# Altium PCB H-bridge_(withoutWires).PcbDoc
Units mm, origin at the board's own origin, x right, y up, seen from the top; angles counter-clockwise.
Board outline 157.99 x 101.6 mm, 2 copper layers (Top Layer, Bottom Layer); 69 components, 61 nets, 204 pads, 17 vias.
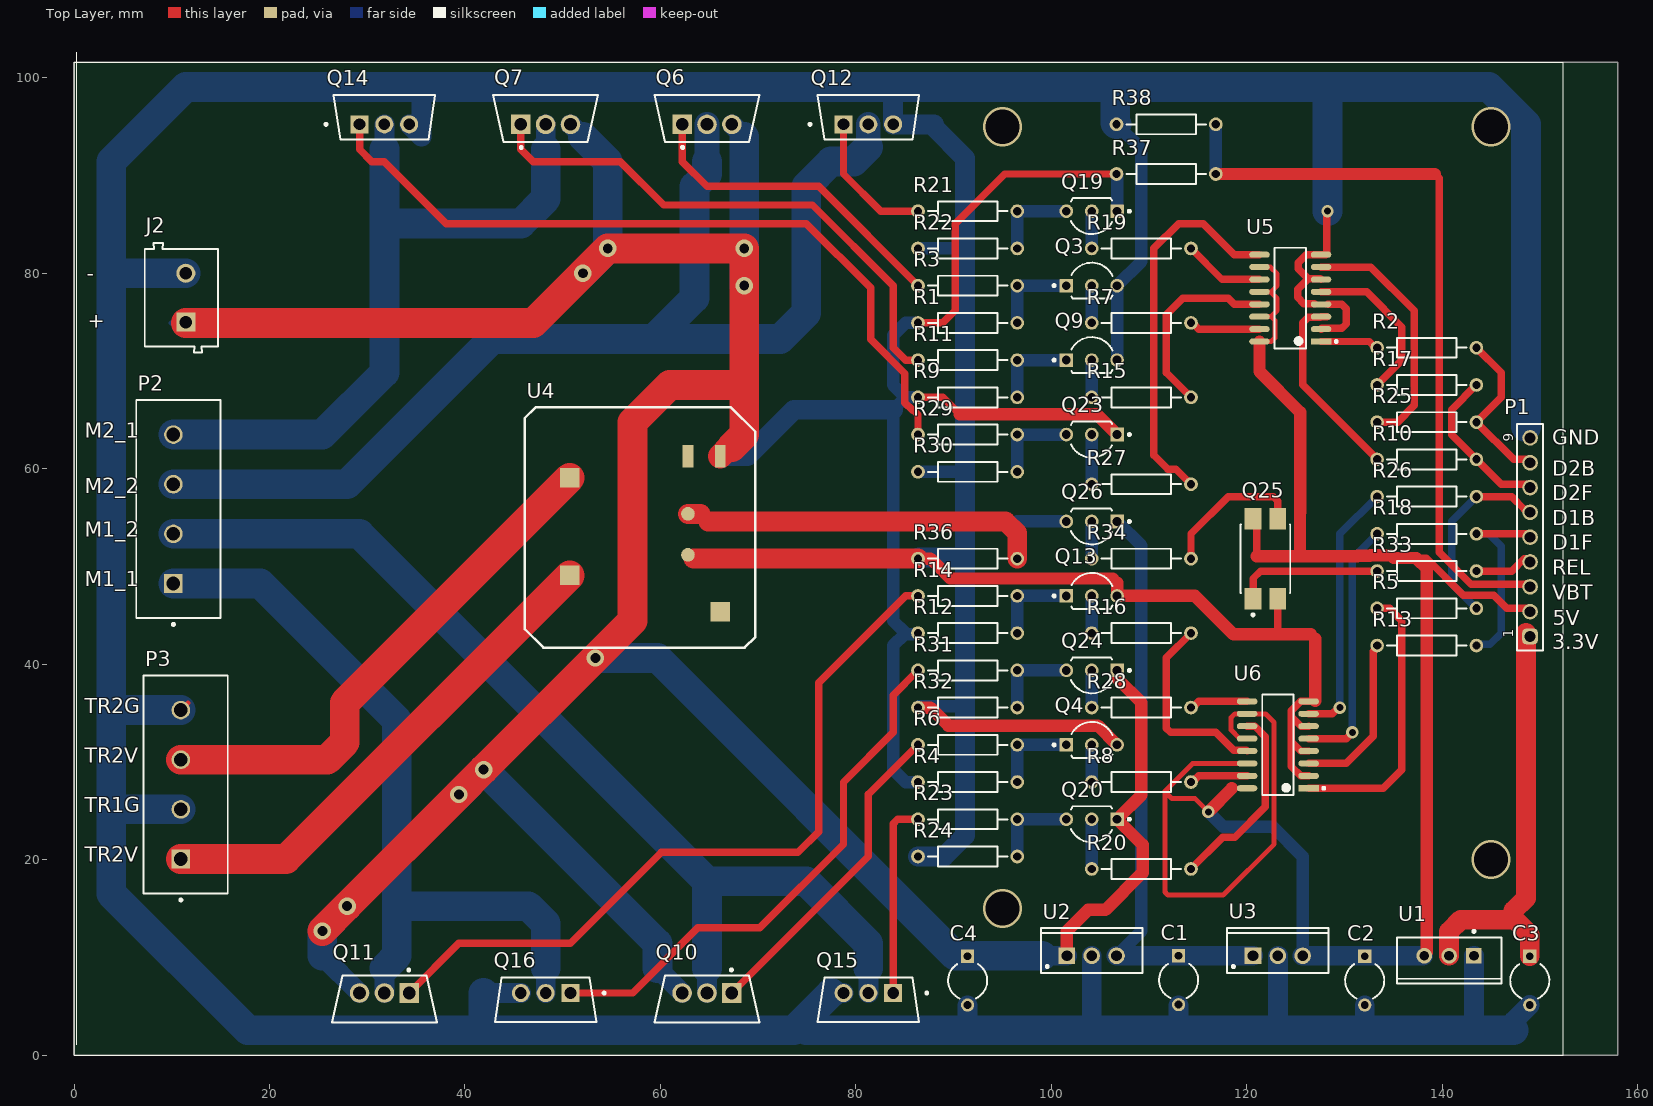
[diagram p0: Top Layer view]
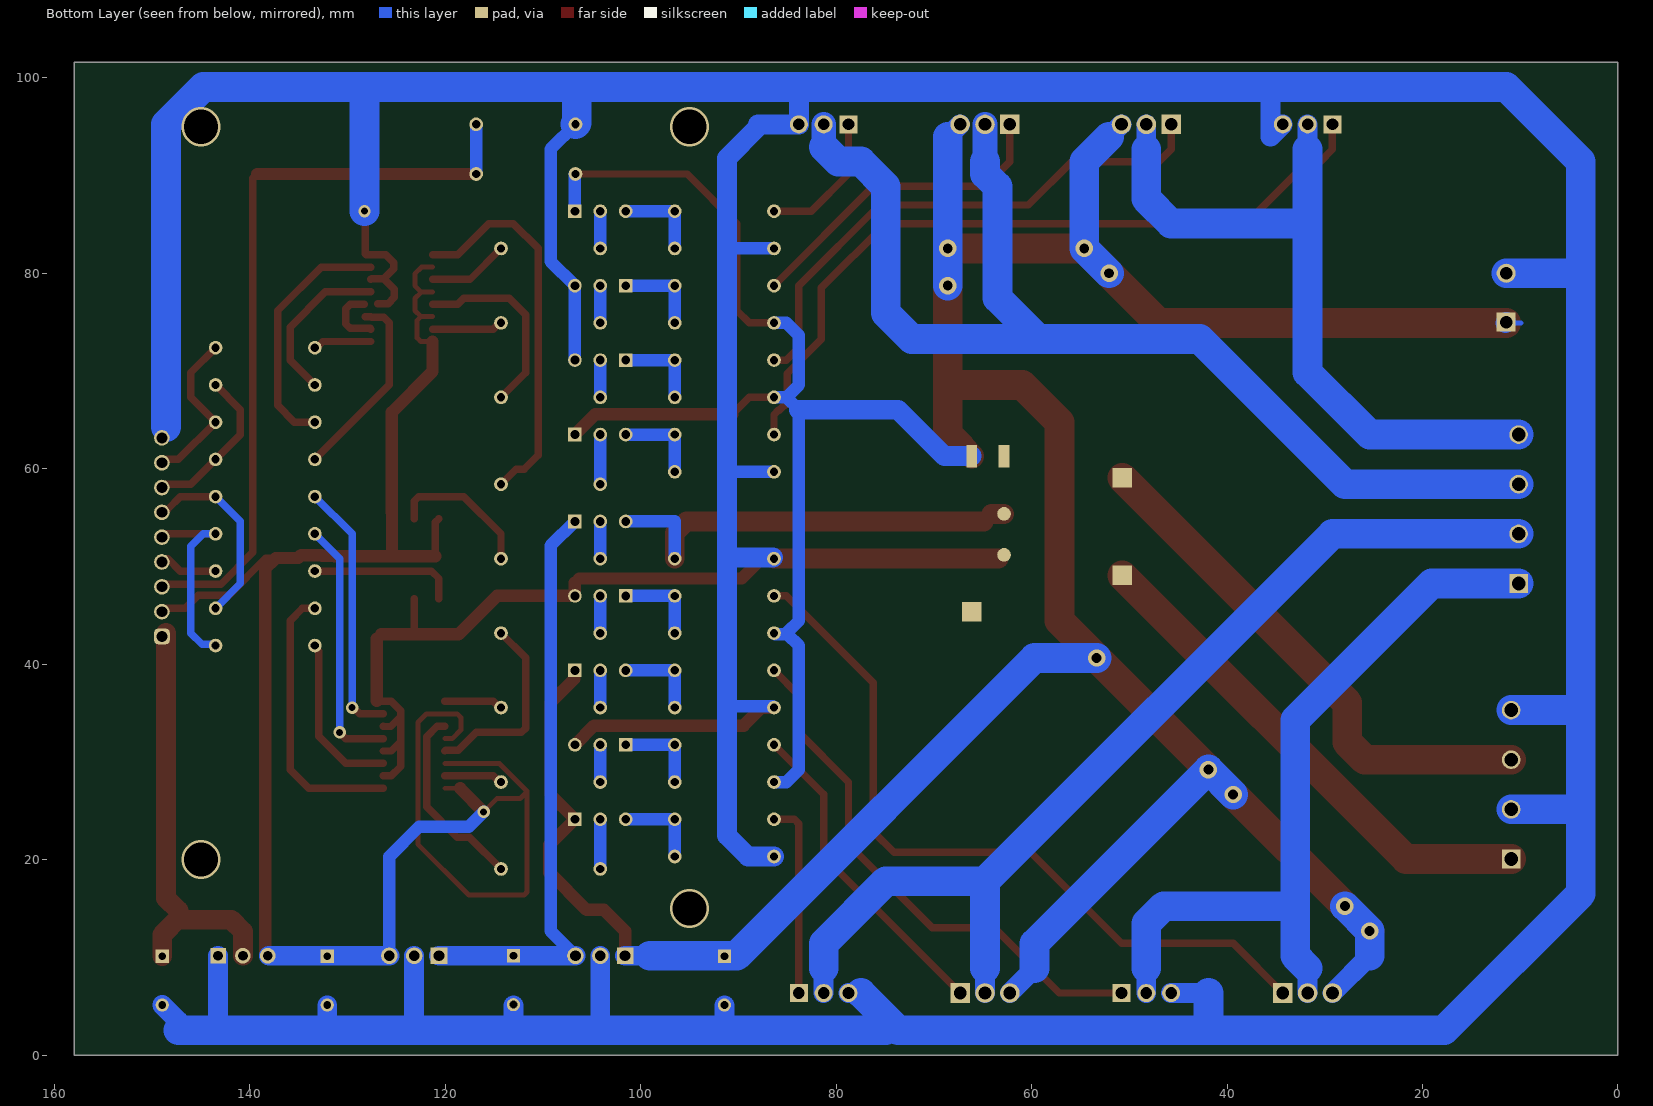
[diagram p1: Bottom Layer view, seen from below]

## Layer stack, top to bottom
Top Solder: solder mask 0.0254, SM-001, Dk 4
Top Layer: signal copper 0.175
Dielectric 1: dielectric 0.32, FR-4, Dk 4.8
Bottom Layer: signal copper 0.175
Bottom Solder: solder mask 0.0254, SM-001, Dk 4

## Board outline
0,0 0,101.6 157.988,101.6 157.988,0

## Design rules (kind name [scope] priority, off if disabled: settings)
Clearance [All] p1: gap=0.254 ignorepadtopadclearanceinfootprint=FALSE except(0: Arc-Hole Track-Hole SMDPad-Hole THPad-Hole Via-Hole Fill-Hole Poly-Hole Region-Hole Text-Hole)
PolygonConnect [All] p1: connectstyle=Relief reliefconductorwidth=0.254 reliefentries=4 polygonreliefangle="90 Angle" airgapwidth=0.254
RoutingVias [All] p1: holewidth=0.711 width=1.27 viastyle="Through Hole" minholewidth=0.711 minwidth=1.27 maxholewidth=0.711 maxwidth=1.27
SolderMaskExpansion [All] p1: expansion=0.102 istentingtop=FALSE
Width [All] p1: maxlimit=3.048 minlimit=0.254 preferedwidth=0.508 minimp=50.000000 maximp=50.000000 favimp=50.000000
30 further rules are at their usual default settings.

## Components (designator, comment, footprint, x,y, rotation, side; value= is the part's Value field where it differs from the comment)
C1 "Cap2" CAPR5-4X5 113.03,7.66 r270 top value=100mF
C2 "Cap2" CAPR5-4X5 132.08,7.62 r270 top value=100mF
C3 "Cap2" CAPR5-4X5 148.971,7.62 r270 top value=100mF
C4 "Cap2" CAPR5-4X5 91.44,7.62 r270 top value=100mF
J2 "691102710002" 691102710002 10.98,77.51 r90 top
P1 "61300911121" 61300911121 149,53 r90 top
P2 "1755752" PHOE-1755752-4_V 10.16,55.88 r90 top
P3 "1755752" PHOE-1755752-4_V 10.922,27.686 r90 top
Q3 "BC337-40ZL1G" ONSC-TO-92-3-29-11_AM_BL 104.14,78.74 r0 top
Q4 "BC337-40ZL1G" ONSC-TO-92-3-29-11_AM_BL 104.14,31.75 r0 top
Q6 "IRF4905PBF" FP-PG-TO220-3-MFG#1 64.77,95.86 r90 top
Q7 "IRF4905PBF" FP-PG-TO220-3-MFG#1 48.26,95.86 r90 top
Q9 "BC337-40ZL1G" ONSC-TO-92-3-29-11_AM_BL 104.14,71.12 r0 top
Q10 "IRF4905PBF" FP-PG-TO220-3-MFG#1 64.77,5.74 r270 top
Q11 "IRF4905PBF" FP-PG-TO220-3-MFG#1 31.75,5.74 r270 top
Q12 "IRF2805PBF" FP-PG-TO220-3-MFG#2 81.28,95.955 r90 top
Q13 "BC337-40ZL1G" ONSC-TO-92-3-29-11_AM_BL 104.14,46.99 r0 top
Q14 "IRF2805PBF" FP-PG-TO220-3-MFG#2 31.75,95.955 r90 top
Q15 "IRF2805PBF" FP-PG-TO220-3-MFG#2 81.28,5.645 r270 top
Q16 "IRF2805PBF" FP-PG-TO220-3-MFG#2 48.26,5.645 r270 top
Q19 "BC337-40ZL1G" ONSC-TO-92-3-29-11_AM_BL 104.14,86.36 r180 top
Q20 "BC337-40ZL1G" ONSC-TO-92-3-29-11_AM_BL 104.14,24.13 r180 top
Q23 "BC337-40ZL1G" ONSC-TO-92-3-29-11_AM_BL 104.14,63.5 r180 top
Q24 "BC337-40ZL1G" ONSC-TO-92-3-29-11_AM_BL 104.14,39.37 r180 top
Q25 "PC817XNNIP0F" FP-PC817XNNIP0F-MFG 121.92,50.8 r90 top
Q26 "BC337-40ZL1G" ONSC-TO-92-3-29-11_AM_BL 104.14,54.61 r180 top
R1 "Res2" AXIAL-0.4 91.44,74.93 r180 top value=10K
R2 "Res2" AXIAL-0.4 138.43,72.39 r180 top value=100
R3 "Res2" AXIAL-0.4 91.44,78.74 r0 top value=1K
R4 "Res2" AXIAL-0.4 91.44,27.94 r180 top value=10K
R5 "Res2" AXIAL-0.4 138.43,45.72 r180 top value=100
R6 "Res2" AXIAL-0.4 91.44,31.75 r0 top value=1K
R7 "Res2" AXIAL-0.4 109.22,74.93 r180 top value=1K
R8 "Res2" AXIAL-0.4 109.22,27.94 r180 top value=1K
R9 "Res2" AXIAL-0.4 91.44,67.31 r180 top value=10K
R10 "Res2" AXIAL-0.4 138.43,60.96 r180 top value=100
R11 "Res2" AXIAL-0.4 91.44,71.12 r0 top value=1K
R12 "Res2" AXIAL-0.4 91.44,43.18 r180 top value=10K
R13 "Res2" AXIAL-0.4 138.43,41.91 r180 top value=100
R14 "Res2" AXIAL-0.4 91.44,46.99 r0 top value=1K
R15 "Res2" AXIAL-0.4 109.22,67.31 r180 top value=1K
R16 "Res2" AXIAL-0.4 109.22,43.18 r180 top value=1K
R17 "Res2" AXIAL-0.4 138.43,68.58 r180 top value=100
R18 "Res2" AXIAL-0.4 138.43,53.34 r180 top value=100
R19 "Res2" AXIAL-0.4 109.22,82.55 r180 top value=1K
R20 "Res2" AXIAL-0.4 109.22,19.05 r180 top value=1K
R21 "Res2" AXIAL-0.4 91.44,86.36 r0 top value=1K
R22 "Res2" AXIAL-0.4 91.44,82.55 r180 top value=10K
R23 "Res2" AXIAL-0.4 91.44,24.13 r0 top value=1K
R24 "Res2" AXIAL-0.4 91.44,20.32 r180 top value=10K
R25 "Res2" AXIAL-0.4 138.43,64.77 r180 top value=100
R26 "Res2" AXIAL-0.4 138.43,57.15 r180 top value=100
R27 "Res2" AXIAL-0.4 109.22,58.42 r180 top value=1K
R28 "Res2" AXIAL-0.4 109.22,35.56 r180 top value=1K
R29 "Res2" AXIAL-0.4 91.44,63.5 r0 top value=1K
R30 "Res2" AXIAL-0.4 91.44,59.69 r180 top value=10K
R31 "Res2" AXIAL-0.4 91.44,39.37 r0 top value=1K
R32 "Res2" AXIAL-0.4 91.44,35.56 r180 top value=10K
R33 "Res2" AXIAL-0.4 138.43,49.53 r180 top value=100
R34 "Res2" AXIAL-0.4 109.22,50.8 r180 top value=1K
R36 "Res2" AXIAL-0.4 91.44,50.8 r180 top value=10K
R37 "Res2" AXIAL-0.4 111.76,90.17 r180 top value=9K
R38 "Res2" AXIAL-0.4 111.76,95.25 r0 top value=1K
U1 "LM1117T-3.3/NOPB" NDE0003A 140.716,10.16 r180 top
U2 "L7812CV" TO220 104.14,10.16 r0 top
U3 "L7805CV" TO220 123.19,10.16 r0 top
U4 "dg19-2021-35-1012-11" DG19-2021-35-1012-11 58.42,53.34 r270 top
U5 "PS2801C-4-F3-A" FP-PS2801C-4-F3-A-IPC_A 124.46,77.47 r180 top
U6 "PS2801C-4-F3-A" FP-PS2801C-4-F3-A-IPC_A 123.19,31.75 r180 top

## Footprints (in the part's own frame and the unit in brackets; to place one, negate y for a bottom-side part, rotate by r counter-clockwise, add the part's x,y. Pads: shape width x height; smd on the part's side, far side on the other; paste and mask are expansions set on the pad)
61300911121 [mm] "Pin Header, pitch 2.54 mm, THT, Vertical, single row, 9p"
  rrect50% 1.6x1.6 hole 1.1: 1(-10.16,0)
  round 1.6 hole 1.1: 2(-7.62,0) 3(-5.08,0) 4(-2.54,0) 5(0,0) 6(2.54,0) 7(5.08,0) 8(7.62,0) 9(10.16,0)
  silkscreen extent -11.58,-1.34 11.58,1.34, body extent -11.43,-1.27 11.43,1.27, height 8.57
691102710002 [mm] "5,00mm - modular - blue - Horizontal entry with pressure clamp - 9,9 mm height - 02p"
  rect 1.95x1.95 hole 1.3: 1(-2.5,-0.45)
  round 1.95 hole 1.3: 2(2.5,-0.45)
  silkscreen extent -5.6,-3.75 5.6,3.75, body extent -5.6,-3.75 5.6,3.75, height 9.96
AXIAL-0.4 [mm] "Axial Device, Thru-Hole; 2 Leads; 0.4 in Pin Spacing"
  round 1.4 hole 0.85: 1(-5.08,0) 2(5.08,0)
  silkscreen extent -4.06,-1.02 4.06,1.02
CAPR5-4X5 [mm] "Capacitor; 2 Leads"
  rect 1.35x1.35 hole 0.8: 1(-2.5,0)
  round 1.35 hole 0.8: 2(2.5,0)
  silkscreen extent -1.69,-2 1.82,2
DG19-2021-35-1012-11 [mm]
  rect 2x2 all layers, no hole: 1(4.25,-7.7) 2(-5.75,-7.7) 7(7.95,7.7)
  rect 2.3x1.1 all layers, no hole: 3(-7.95,4.4) 4(-7.95,7.7)
  round 1.4 all layers, no hole: 5(-2.05,4.4) 6(2.15,4.4)
  silkscreen extent -12.95,-12.3 11.65,11.3
FP-PC817XNNIP0F-MFG [mm]
  rect 2.2x1.7 smd paste+0 mask+0: 1(-4.1,1.27) 2(-4.1,-1.27) 3(4.1,-1.27) 4(4.1,1.27)
  silkscreen extent -5.87,-2.54 3.5,2.54, body extent -5.3,-2.64 5.3,2.64, height 0.25
FP-PG-TO220-3-MFG#1 [mm]
  rect 2x2 hole 1.3 paste-2539.97 mask+0: 1(-0.61,2.54)
  round 2 hole 1.3 paste-2539.97 mask+0: 2(-0.61,0) 3(-0.61,-2.54)
  silkscreen extent -3.1,-5.37 2.41,5.37, body extent -2.51,-5.48 2.51,5.48, height 0.25
FP-PG-TO220-3-MFG#2 [mm]
  rect 1.85x1.85 hole 1.2 paste-2539.97 mask+0: 1(-0.705,2.54)
  round 1.85 hole 1.2 paste-2539.97 mask+0: 2(-0.705,0) 3(-0.705,-2.54)
  silkscreen extent -2.27,-5.2 2.27,6.1, body extent -2.37,-5.55 2.37,5.55, height 0.25
FP-PS2801C-4-F3-A-IPC_A [mm]
  rect 2.103x0.616 smd paste+0 mask+0: 1(-3.15,4.445)
  rrect100% 2.103x0.616 smd paste+0 mask+0: 2(-3.15,3.175) 3(-3.15,1.905) 4(-3.15,0.635) 5(-3.15,-0.635) 6(-3.15,-1.905) 7(-3.15,-3.175) 8(-3.15,-4.445) 9(3.15,-4.445) 10(3.15,-3.175) 11(3.15,-1.905) 12(3.15,-0.635) 13(3.15,0.635) 14(3.15,1.905) 15(3.15,3.175) 16(3.15,4.445)
  silkscreen extent -4.83,-5.15 1.6,5.15, body extent -4.7,-5.65 4.7,5.65, height 0.25
NDE0003A [mm] "FM, 3-Leads, Body 10.7x4.7mm, Pitch 2.54mm"
  rect 1.6x1.6 hole 1: 1(-2.54,0)
  round 1.6 hole 1: 2(0,0) 3(2.54,0)
  silkscreen extent -5.35,-2.62 5.35,2.85, body extent -5.4,-1.9 5.4,2.9, height 19.4
ONSC-TO-92-3-29-11_AM_BL [mm] "TO, 3-Leads, Body Dia 4.7mm, Pitch 2.6mm"
  rect 1.4x1.4 hole 0.9: 1(-2.6,0)
  round 1.4 hole 0.9: 2(0,0) 3(2.6,0)
  silkscreen extent -3.97,-1.34 2.13,2.35, body extent -2.84,-1.34 2.84,2.35, height 5.33
PHOE-1755752-4_V [mm] "TH, 4-Leads, Body 21.32x8.6mm, Pitch 5.08mm"
  rect 1.9x1.9 hole 1.4: 1(-7.62,0)
  round 1.9 hole 1.4: 2(-2.54,0) 3(2.54,0) 4(7.62,0)
  silkscreen extent -11.93,-4.8 11.16,3.8, body extent -11.16,-4.8 11.16,3.8, height 12
TO220 [mm] "TO, Thru-Hole, Vertical, Heatsink Mounted; 3 In-Line Leads; Pitch 2.54 mm"
  rect 1.7x1.7 hole 1.1: 1(-2.54,0)
  round 1.7 hole 1.1: 2(0,0) 3(2.54,0)
  silkscreen extent -5.2,-1.75 5.2,2.85, body extent -5.25,-1.8 5.25,2.9, height 19.7

## Part data
C1 C2 C3 C4: "Capacitor", PackageDescription="Capacitor; 2 Leads", PackageReference=CAPR5-4X5, Published=23-Sep-2002, Publisher="Altium Limited"
J2: library part CMP-1502-03258-1, "Series 102 - 5.00 mm Horizontal Entry Modular with Pressure Clamp WR-TBL, 2 pin", Manufacturer="Wurth Elektronik", Operating Temperature=-40to105degC, Datasheet URL=http://katalog.we-online.de/em/datasheet/6911027100xx.pdf, Manufacturer URL=http://www.we-online.de, Mounting Technology=THT, Package Reference=691102710002, Packaging=Box, Part Number=691102710002, Pin Number=2, Pitch=5.00mm, Publisher=WurthElektronik
P1: library part CMP-1502-01080-2, Color=Black, Contact Resistance=20mΩ, Current Rating=3A, Operating Supply Voltage=250V, Connector Type="Male Pin", Contact Material=Copper, Contact Mating Length=5.9944mm, Contact Plating=Gold, Gender=Male, Lead Pitch=2.54mm, Mount="Through Hole", NexarPartId=32855536, Number of Contacts=9, Number of Pins=9, Number of Positions=9, Number of Rows=1, Orientation=Vertical, Packaging=Bulk, Pitch=2.54mm, REACH SVHC=Unknown, RoHS=Compliant, Termination=Solder
P2 P3: library part CMP-2000-05301-1, "Male Header, Pitch 5.08 mm, 1 x 4 Position, Height 12 mm, Tail Length 3.9 mm, 4-Pin THD, RoHS, Bulk", Colour=Green, Manufacturer="Phoenix Contact", Content=250pc(s), Datasheet URL=https://datasheet.ciiva.com/29210/569389-da-01-en-grundgehaeuse-1755752-250-st-29210608.pdf, Datasheet Version=Nov-13, Industrial packaging=Yes, Manufacturer part No.=1755752, Manufacturer URL=http://www.phoenixcontact.com/, Number of Contacts=4, Pitch=5.08mm, Type=MSTBVA2,5/4-G-5,08
Q3 Q4 Q9 Q13 Q19 Q20 Q23 Q24 Q26: library part CMP-1048-01583-1, "Amplifier Transistor, NPN Silicon, 3-Pin TO-92, Pb-Free, Ammo Box", Manufacturer="On Semiconductor", ComponentLink1Description="Manufacturer URL", ComponentLink1URL=http://www.onsemi.com/, ComponentLink2Description=Datasheet, ComponentLink2URL=http://www.onsemi.com/pub_link/Collateral/BC337-D.PDF, ComponentLink3Description="Package Specification", ComponentLink3URL=http://www.onsemi.com/pub_link/Collateral/MAC97-D.PDF, DatasheetVersion="Rev. 8", IC Continuous (A)=0.8, Mounting Technology="Through Hole", PackageDescription="3-Pin Transistor Outline, Body 4.825 x 3.685 mm, Pitch 1.27 mm", PackageReference=TO-92-3-29-11_AM_BL, PackageVersion="Rev. AM", Packing="Ammo Box", PartNumber=BC337-40ZL1G, Polarity=NPN, RoHS=TRUE
Q6 Q7 Q10 Q11: library part CMP-32901-000200-1, "MOSFET P-CH 55V 74A TO-220AB", Case/Package=TO-220, Continuous Drain Current (ID)=74A, Drain to Source Breakdown Voltage=-55V, Drain to Source Resistance=20mR, Gate to Source Voltage (Vgs)=20V, Input Capacitance=3.4nF, Max Operating Temperature=175°C, Max Power Dissipation=200W, Min Operating Temperature=-55°C, Threshold Voltage=-4V, Drain to Source Voltage (Vdss)=-55V, Element Configuration=Single, Halogen Free="Halogen Free", Height=0.6inch, Lead Free="Lead Free", Length=0.414inch, Max Dual Supply Voltage=-55V, Mount="Through Hole", Number of Pins=3, Packaging=Rail/Tube, Power Dissipation=200W, Rds On Max=20mR, REACH SVHC="No SVHC", RoHS Compliant=Yes, Turn-Off Delay Time=61ns, Turn-On Delay Time=18ns, Width=0.185inch
Q12 Q14 Q15 Q16: library part CMP-32901-001056-1, "MOSFET N-CH 55V 75A TO220AB", Case/Package=TO-220, Continuous Drain Current (ID)=75A, Drain to Source Breakdown Voltage=55V, Drain to Source Resistance=4.7mR, Gate to Source Voltage (Vgs)=20V, Input Capacitance=5.11nF, Max Operating Temperature=175°C, Max Power Dissipation=330W, Min Operating Temperature=-55°C, Threshold Voltage=4V, Drain to Source Voltage (Vdss)=55V, Element Configuration=Single, Halogen Free="Halogen Free", Height=0.65inch, Lead Free="Lead Free", Length=0.42inch, Max Dual Supply Voltage=55V, Mount="Through Hole", Number of Pins=3, Packaging=Rail/Tube, Polarization=N, Power Dissipation=330W, Rds On Max=4.7mR, REACH SVHC="No SVHC", RoHS Compliant=Yes, Series=HEXFET®, Turn-Off Delay Time=68ns, Turn-On Delay Time=14ns, Width=0.19inch
Q25: library part CMP-65434-000005-1, "OPTOISOLATOR 5KV TRANS 4SMD", Case/Package=SMD/SMT, Collector Emitter Saturation Voltage=200mV, Collector Emitter Voltage (VCEO)=80V, Forward Current=50mA, Forward Voltage=1.4V, Isolation Voltage=5kV, Max Operating Temperature=100°C, Max Power Dissipation=200mW, Min Operating Temperature=-30°C, Output Current per Channel=30mA, Package Quantity=2000, Reverse Breakdown Voltage=6V, Collector-emitter Voltage-Max=200mV, Contact Plating=Copper, Fall Time=18000ns, Input Current=50mA, Input Type=DC, Isolation Voltage-Max=5kV, Lead Free="Lead Free", Max Collector Current=50mA, Max Input Current=50mA, Max Output Voltage=80V, Mount="Surface Mount", Number of Channels=1, Number of Elements=1, Number of Pins=4, Output Voltage=80V, Packaging="Tape and Reel", Power Dissipation=200mW, Radiation Hardening=No, Rise Time=18000ns, RoHS Compliant=Yes
R1 R2 R3 R4 R5 R6 R7 R8 R9 R10 R11 R12 R13 R14 R15 R16 R17 R18 R19 R20 R21 R22 R23 R24 R25 R26 R27 R28 R29 R30 R31 R32 R33 R34 R36 R37 R38: "Resistor", LatestRevisionDate=17-Jul-2002, LatestRevisionNote="Re-released for DXP Platform.", PackageDescription="Axial Device, Thru-Hole; 2 Leads; 0.4 in Pin Spacing", PackageReference=AXIAL-0.4, Published=8-Jun-2000, Publisher="Altium Limited"
U1: library part CMP-0062-02494-3, "800mA Low-Dropout Linear Regulator, 3-pin TO-220, Pb-Free", Manufacturer="Texas Instruments", PackageTopMarking=NSUZXYTTE#*LM1117T*3.3, PowerWise=N, ComponentLink1Description="Datasheet URL", ComponentLink1URL=http://www.ti.com/general/docs/lit/getliterature.tsp?genericPartNumber=LM1117-N&fileType=pdf, CompType="LDO IC", PackageDescription="TO-220, Molded, 3 Lead, Straight", PackageReference=NDE0003A, PinCount=3, RoHS=Y
U2: library part CMP-0244-00450-1, "Positive Voltage Regulator, 12V, 3-Pin TO-220", ComponentLink1Description="Manufacturer URL", ComponentLink1URL=http://www.st.com, ComponentLink2Description=Datasheet, ComponentLink2URL=http://www.st.com/internet/com/TECHNICAL_RESOURCES/TECHNICAL_LITERATURE/DATASHEET/CD00000444.pdf, ComponentLink3Description="Package Specification", ComponentLink3URL=http://www.st.com/internet/com/TECHNICAL_RESOURCES/TECHNICAL_LITERATURE/PACKAGE_INFORMATION/CD00004649.pdf, DatasheetVersion=16/11/2011, PackageDescription="TO, Thru-Hole, Vertical, Heatsink Mounted; 3 In-Line Leads; Pitch 2.54 mm", PackageReference=TO220, PackageVersion=ver3.0
U3: library part CMP-0244-00483-1, "Positive Voltage Regulator, 5V, 3-Pin TO-220", ComponentLink1Description="Manufacturer URL", ComponentLink1URL=http://www.st.com, ComponentLink2Description=Datasheet, ComponentLink2URL=http://www.st.com/internet/com/TECHNICAL_RESOURCES/TECHNICAL_LITERATURE/DATASHEET/CD00000444.pdf, ComponentLink3Description="Package Specification", ComponentLink3URL=http://www.st.com/internet/com/TECHNICAL_RESOURCES/TECHNICAL_LITERATURE/PACKAGE_INFORMATION/CD00004649.pdf, DatasheetVersion=16/11/2011, PackageDescription="TO, Thru-Hole, Vertical, Heatsink Mounted; 3 In-Line Leads; Pitch 2.54 mm", PackageReference=TO220, PackageVersion=ver3.0
U5 U6: library part CMP-13576-000002-1, "OPTOISO 2.5KV 4CH TRANS 16-SSOP", Case/Package=SSOP, Collector Emitter Saturation Voltage=300mV, Collector Emitter Voltage (VCEO)=80V, Current Transfer Ratio=400%, Forward Current=30mA, Forward Voltage=1.4V, Input Current=5mA, Isolation Voltage=2.5kV, Max Operating Temperature=100°C, Min Operating Temperature=-55°C, Reverse Breakdown Voltage=6V, Input Type=DC, Lead Free="Lead Free", Mount="Surface Mount", Number of Elements=4, Number of Pins=16, Output Voltage=80V, Packaging="Tape and Reel", Radiation Hardening=No, REACH SVHC="No SVHC", RoHS Compliant=Yes

## Via types
v1: diameter 1.778, hole 1.016, Top Layer to Bottom Layer, 9 vias
v2: diameter 4, hole 3.5, Top Layer to Bottom Layer, 4 vias
v3: diameter 1.27, hole 0.711, Top Layer to Bottom Layer, 4 vias

## Nets (pads, with @x,y where several pads share a name; then routed paths per layer and width w, separated by ;. In a path a pad name is that pad's centre, name@x,y a point inside that pad or via, vN(x,y) a via of type N, cw(c..) or ccw(c..) an arc to the next point about the centre after c; other vN are vias at no path point)
3.3V: C3.1 P1.1 U1.2 | length 44.2
  Top Layer w2.032: U1.2 140.716,12.653 141.906,13.843 147.32,13.843 147.32,14.778 148.59,16.048 P1.1@148.59,43.18 ; 147.193,14.097 148.971,12.319 C3.1
5V: C2.1 P1.2 Q25.4 U1.3 U3.3 U5.10 U5.12 U5.14 U5.16 U6.10 U6.12 U6.14 U6.16 | length 210.8
  Top Layer w0.508: v3(116.078,24.892) 114.735,26.235 112.355,26.235 111.633,26.956 ; 118.491,27.305 U6.16 ; U6.14 114.478,29.845 111.633,27 111.633,26.956 ; U6.12 119.304,32.385 118.415,33.274 118.415,34.544 118.796,34.925 U6.10 121.92,34.925 122.809,34.036 122.809,21.59 117.602,16.383 111.931,16.383 111.633,16.681 111.633,26.956 ; U5.16 122.504,73.025 122.885,73.406 122.885,75.184 122.504,75.565 122.479,75.565 ; U5.14 122.479,75.565 ; U5.10 122.428,80.645 123.114,79.959 123.114,78.74 122.453,78.08 ; 125.456,55.523 125.476,55.543 ; 137.349,50.865 137.482,50.732 ; 122.453,78.08 123.114,77.419 123.114,76.2 122.479,75.565 ; 122.453,78.08 122.428,78.105 U5.12 122.453,78.08
  Top Layer w0.762: Q25.4 121.031,54.519 121.031,51.054 ; 131.318,51.054 131.366,51.102 ; 137.349,50.865 138.365,50.865 142.175,47.055 145.269,47.055 146.604,45.72 P1.2@148.59,45.72
  Top Layer w1.27: v3(116.078,24.892) 118.491,27.305 ; 121.031,51.054 131.318,51.054 ; U5.16 121.31,69.952 125.476,65.786 125.476,55.543 ; 125.456,51.694 125.456,55.523 ; 131.366,51.102 132.612,51.102 132.677,51.167 134.761,51.167 135.063,50.865 137.349,50.865 ; 137.482,50.732 138.43,49.784 138.43,10.503 138.239,10.312 U1.3@138.295,10.256
  Bottom Layer w1.27: v3(116.078,24.892) 117.587,23.383 122.667,23.383 125.73,20.32 U3.3@125.73,10.53
  Bottom Layer w2.032: U3.3 U1.3@138.049,10.16
12V: C1.1 Q26.1 U2.3 U3.1 | length 60.8
  Top Layer w0.762: U2.3@106.68,10.53 U2.3@106.934,10.53
  Bottom Layer w1.27: U2.3 109.22,12.7 109.22,52.13 Q26.1
  Bottom Layer w2.032: U2.3 C1.1 U3.1
D1B1: Q10.1 R6.1 | length 33.3
  Top Layer w0.762: Q10.1 81.28,20.32 81.28,26.67 R6.1
D1B1C: P1.6 R5.1 R26.1 | length 19.1
  Top Layer w0.762: R26.1 147.112,57.15 148.382,55.88 P1.6@148.59,55.88
  Bottom Layer w0.762: R5.1 140.97,48.26 140.97,54.61 R26.1
D1B2: Q16.1 R31.1 | length 55.2
  Top Layer w0.762: Q16.1 57.15,6.35 63.817,13.018 70.168,13.018 78.74,21.59 78.74,27.94 83.82,33.02 83.82,36.83 R31.1
D1F1: Q11.1 R14.1 | length 77.8
  Top Layer w0.762: Q11.1 39.37,11.43 50.8,11.43 60.104,20.734 74.074,20.734 76.2,22.86 76.2,38.1 85.09,46.99 R14.1
D1F1C: P1.5 R13.1 R18.1 | length 20.1
  Top Layer w0.762: R18.1 P1.5@148.59,53.34
  Bottom Layer w0.762: R13.1 143.632,42.032 144.902,42.032 146.05,43.18 146.05,52.07 144.78,53.34 R18.1
D1F2: Q15.1 R23.1 | length 20.1
  Top Layer w0.762: Q15.1 83.82,23.684 84.266,24.13 R23.1
D1M1: P2.1 Q11.2 Q16.2 | length 80.2
  Bottom Layer w2.032: Q11.2 31.75,8.89 ; Q16.2 48.26,8.89
  Bottom Layer w3.048: P2.1 19.05,48.26 33.02,34.29 33.02,15.24 ; 31.75,8.89 33.02,10.16 33.02,15.24 ; 48.26,8.89 48.26,13.455 46.475,15.24 33.02,15.24
D1M2: P2.2 Q10.2 Q15.2 | length 105
  Bottom Layer w2.032: Q10.2 64.77,8.89 ; Q15.2 81.28,8.89
  Bottom Layer w3.048: P2.2 29.21,53.34 64.77,17.78 ; 64.77,8.89 64.77,17.78 ; 81.28,8.89 81.28,11.43 74.93,17.78 64.77,17.78
D2B1: Q6.1 R3.1 | length 33.2
  Top Layer w0.762: Q6.1 62.23,91.44 64.77,88.9 76.2,88.9 R3.1
D2B1C: P1.8 R2.1 R25.1 | length 16.4
  Top Layer w0.762: R2.1 146.05,69.85 146.05,67.31 R25.1 147.32,60.96 P1.8@148.59,60.96
D2B2: Q14.1 R29.1 | length 77.8
  Top Layer w0.762: Q14.1 29.21,92.71 30.48,91.44 31.75,91.44 38.1,85.09 74.93,85.09 81.507,78.513 81.507,73.266 85.025,69.748 85.025,66.757 85.807,65.975 85.914,65.975 86.36,65.529 R29.1
D2F1: Q7.1 R11.1 | length 55.8
  Top Layer w0.762: Q7.1 45.72,92.71 46.99,91.44 55.88,91.44 60.325,86.995 75.565,86.995 83.82,78.74 83.82,72.39 85.09,71.12 R11.1
D2F1C: P1.7 R10.1 R17.1 | length 15.9
  Top Layer w0.762: R17.1 140.97,66.04 140.97,63.5 R10.1 146.05,58.42 P1.7@148.59,58.42
D2F2: Q12.1 R21.1 | length 14.3
  Top Layer w0.762: Q12.1 78.74,90.17 82.55,86.36 R21.1
D2M1: P2.4 Q7.2 Q14.2 | length 74.8
  Bottom Layer w2.032: 31.75,92.71 Q14.2 ; 48.26,92.71 Q7.2
  Bottom Layer w3.048: P2.4 25.4,63.5 31.75,69.85 31.75,92.71 ; 31.75,85.09 45.72,85.09 48.26,87.63 48.26,92.71
D2M2: P2.3 Q6.2 Q12.2 | length 119.5
  Bottom Layer w2.54: 64.77,91.44 Q6.2 ; 81.28,92.928 Q12.2
  Bottom Layer w3.048: P2.3 27.94,58.42 42.799,73.279 72.263,73.279 74.93,75.946 74.93,88.9 77.47,91.44 79.792,91.44 81.28,92.928 ; 59.372,73.343 63.5,77.47 63.5,88.9 64.77,90.17 64.77,91.44
Drivers_VCC: C4.1 J2.1 Q6.3 Q7.3 Q10.3 Q11.3 Q19.1 Q20.1 Q23.1 Q24.1 R1.2 R4.2 R9.2 R12.2 R37.2 U2.1 U4.4 | length 474.1
  Top Layer w0.762: R9.2 88.9,67.31 90.645,65.565 ; R1.2 88.9,74.93 90.17,76.2 90.17,85.09 95.25,90.17 R37.2
  Top Layer w1.27: 90.645,65.565 104.675,65.565 Q23.1 ; U2.1 101.6,12.7 103.759,14.859 105.537,14.859 109.347,18.669 109.347,21.523 Q20.1 109.22,26.61 109.22,36.068 106.805,38.483 106.805,39.305 Q24.1
  Top Layer w2.54: U4.4 67.06,62.23 67.31,62.23
  Top Layer w3.048: J2.1@11.43,74.93 19.05,74.93 46.99,74.93 v1(52.07,80.01) v1(54.61,82.55) v1(68.58,82.55) v1(68.58,78.74) 68.58,68.58 ; v1(25.4,12.7) v1(27.94,15.24) v1(39.37,26.67) v1(41.91,29.21) v1(53.34,40.64) 57.15,44.45 57.15,64.77 60.96,68.58 68.58,68.58 ; 67.31,62.23 68.58,63.5 68.58,68.58
  Bottom Layer w0.508: 9.906,74.93 J2.1@11.51,74.93 ; Q20.1 Q20.1@106.782,24.13
  Bottom Layer w0.762: 84.968,43.058 84.968,43.302 ; R12.2@86.238,43.058 R12.2 ; R37.2 R37.2@106.74,90.17
  Bottom Layer w1.27: 84.968,43.302 83.82,44.45 83.82,66.04 85.09,67.31 ; R12.2@86.238,43.058 84.968,43.058 83.82,41.91 83.82,29.21 85.09,27.94 R4.2 ; R9.2 85.09,67.31 ; R1.2 85.09,74.93 83.82,73.66 83.82,68.58 85.09,67.31 ; Q19.1 R37.2@106.74,90.17
  Bottom Layer w2.032: J2.1 J2.1@11.51,74.93 ; 25.4,10.16 Q11.3 ; Q7.3 52.07,93.98 ; 59.69,8.89 Q10.3 ; U4.4 68.91,61.29 73.66,66.04 83.82,66.04 ; Q6.3 68.58,93.98 ; 99.06,10.16 U2.1
  Bottom Layer w3.048: 25.4,10.16 v1(25.4,12.7) v1(27.94,15.24) ; v1(39.37,26.67) v1(41.91,29.21) 59.69,11.43 59.69,8.89 ; v1(52.07,80.01) v1(54.61,82.55) 54.61,91.44 52.07,93.98 ; v1(53.34,40.64) 59.69,40.64 90.17,10.16 99.06,10.16 ; v1(68.58,78.74) v1(68.58,82.55) 68.58,93.98
GND: C1.2 C2.2 C3.2 C4.2 J2.2 P1.9 P3.2 P3.4 Q3.3 Q4.3 Q9.3 Q12.3 Q13.3 Q14.3 Q15.3 Q16.3 Q25.2 R22.2 R24.2 R30.2 R32.2 R36.2 R38.1 U1.1 U2.2 U3.2 U4.6 U5.2 U5.4 U5.6 U5.8 U6.2 U6.4 U6.6 U6.8 | length 769.8
  Top Layer w0.508: P3.4 11.633,36.017
  Top Layer w0.762: U4.6 62.993,51.19 U4.6@63.383,50.8 ; 106.294,48.768 106.74,48.322 ; 122.682,43.053 123.19,43.561 Q25.2 ; U6.2 125.533,28.575 124.579,29.529 124.579,32.069 ; U6.4 125.533,31.115 124.579,32.069 ; U6.6 126.309,33.623 125.565,33.623 124.579,34.609 ; 126.554,43.053 127,42.607 ; U5.4@126.94,76.9 125.857,76.9 125.222,77.535 125.222,78.378 126.292,79.448 ; U6.8@127,36.268 126.927,36.195 U6.8 125.533,36.195 124.579,35.241 124.579,34.609 ; U5.2 127.683,74.368 129.729,74.368 130.175,74.814 130.175,76.381 129.729,76.827 U5.4@128.281,76.827 ; U5.6 127.537,79.448 126.292,79.448 ; v3(128.27,86.36) 128.173,86.263 128.173,81.988 128.1,81.915 U5.8 126.111,81.915 125.284,81.088 125.284,80.456 126.292,79.448 ; 124.579,32.069 124.579,34.609
  Top Layer w1.27: R32.2 87.63,35.56 89.474,33.716 104.774,33.716 Q4.3 ; R36.2 87.63,50.8 89.662,48.768 106.294,48.768 ; 106.74,48.322 Q13.3 114.712,46.99 118.649,43.053 122.682,43.053 126.554,43.053 ; U6.8@127,36.268 127,42.607
  Top Layer w2.032: U4.6@63.383,50.8 R36.2
  Bottom Layer w0.508: 3.81,35.433 3.937,35.306
  Bottom Layer w0.762: R32.2 R32.2@86.482,35.682 ; R36.2 R36.2@86.482,50.922 ; 87.987,94.975 87.987,95.25 ; 91.054,50.922 91.186,51.054 ; 91.059,59.69 91.186,59.563 ; 91.064,35.682 91.186,35.56
  Bottom Layer w1.27: R30.2 91.059,59.69 ; R22.2 91.186,82.55 ; R32.2@86.482,35.682 91.064,35.682 ; R38.1 109.22,92.71 109.22,81.22 Q3.3 Q9.3
  Bottom Layer w2.032: 3.81,24.892 4.064,25.146 ; P3.2 P3.2@11.176,25.4 ; Q14.3 35.56,93.98 35.56,98.933 35.687,99.06 ; 41.91,6.35 Q16.3 ; 77.47,6.35 Q15.3 ; 83.82,99.06 Q12.3 87.987,95.25 ; R24.2 89.027,20.32 91.186,22.479 91.186,35.56 91.186,51.054 91.186,59.563 91.186,82.55 91.186,91.777 87.987,94.975 ; R36.2@86.482,50.922 91.054,50.922 ; 91.44,2.54 C4.2@91.44,5.08 ; 104.14,2.54 U2.2 ; 113.03,2.54 C1.2@113.03,5.08 ; 123.19,2.54 U3.2 ; 132.08,2.54 C2.2@132.08,5.08 ; 140.97,2.54 140.97,2.959 ; 143.256,2.667 U1.1 ; 147.32,2.54 147.32,3.469 C3.2
  Bottom Layer w3.048: 3.937,35.306 P3.4 ; 4.064,25.146 P3.2 ; J2.2 3.937,80.01 3.81,80.137 ; 41.91,6.35 41.91,2.54 ; 74.93,2.54 91.44,2.54 104.14,2.54 113.03,2.54 123.19,2.54 132.08,2.54 140.97,2.54 147.32,2.54 ; 77.47,6.35 73.66,2.54 41.91,2.54 ; R38.1 106.553,95.377 106.553,99.06 ; v3(128.27,86.36) 128.27,99.06 ; 148.59,64.262 148.59,95.25 144.78,99.06 128.27,99.06 ; 3.81,80.137 3.81,35.433 3.81,24.892 3.81,16.51 17.78,2.54 41.91,2.54 ; 3.81,80.137 3.81,91.44 11.43,99.06 35.687,99.06 83.82,99.06 106.553,99.06 ; 106.553,99.06 128.27,99.06
  other v2: 145,95
NetQ3_1: Q3.1 R1.1 R3.2 | length 8.8
  Bottom Layer w1.27: R1.1 R3.2 Q3.1
NetQ3_2: Q3.2 R7.2 | length 3.8
  Bottom Layer w1.27: R7.2 Q3.2
NetQ4_1: Q4.1 R4.1 R6.2 | length 8.8
  Bottom Layer w1.27: R4.1 R6.2 Q4.1
NetQ4_2: Q4.2 R8.2 | length 3.8
  Bottom Layer w1.27: R8.2 Q4.2
NetQ9_1: Q9.1 R9.1 R11.2 | length 8.8
  Bottom Layer w1.27: R9.1 R11.2 Q9.1
NetQ9_2: Q9.2 R15.2 | length 3.8
  Bottom Layer w1.27: R15.2 Q9.2
NetQ13_1: Q13.1 R12.1 R14.2 | length 8.8
  Bottom Layer w1.27: R12.1 R14.2 Q13.1
NetQ13_2: Q13.2 R16.2 | length 3.8
  Bottom Layer w1.27: R16.2 Q13.2
NetQ19_2: Q19.2 R19.2 | length 3.8
  Bottom Layer w1.27: R19.2 Q19.2
NetQ19_3: Q19.3 R21.2 R22.1 | length 8.8
  Bottom Layer w1.27: R22.1 R21.2 Q19.3
NetQ20_2: Q20.2 R20.2 | length 5.1
  Bottom Layer w1.27: R20.2 Q20.2
NetQ20_3: Q20.3 R23.2 R24.1 | length 8.8
  Bottom Layer w1.27: R24.1 R23.2 Q20.3
NetQ23_2: Q23.2 R27.2 | length 5.1
  Bottom Layer w1.27: R27.2 Q23.2
NetQ23_3: Q23.3 R29.2 R30.1 | length 8.8
  Bottom Layer w1.27: R30.1 R29.2 Q23.3
NetQ24_2: Q24.2 R28.2 | length 3.8
  Bottom Layer w1.27: R28.2 Q24.2
NetQ24_3: Q24.3 R31.2 R32.1 | length 8.8
  Bottom Layer w1.27: R32.1 R31.2 Q24.3
NetQ25_1: Q25.1 R33.2 | length 15.1
  Top Layer w0.762: Q25.1 120.65,48.768 121.412,49.53 R33.2
NetQ25_3: Q25.3 R34.1 | length 15
  Top Layer w0.762: R34.1 114.3,53.34 118.11,57.15 122.744,57.15 123.19,56.704 Q25.3
NetQ26_2: Q26.2 R34.2 | length 3.8
  Bottom Layer w1.27: R34.2 Q26.2
NetQ26_3: Q26.3 R36.1 U4.5 | length 46
  Top Layer w0.762: 64.117,55.39 64.897,54.61
  Top Layer w2.032: U4.5 64.117,55.39 ; 64.897,54.61 95.33,54.61 96.52,53.42 R36.1
  Bottom Layer w1.27: R36.1 96.52,54.61 Q26.3
NetR2_2: R2.2 U5.1 | length 6
  Top Layer w0.762: U5.1 132.542,73.025 133.177,72.39 R2.2
NetR5_2: R5.2 U6.1 | length 28.6
  Top Layer w0.762: U6.1 133.985,27.305 135.89,29.21 135.89,44.45 134.62,45.72 R5.2
NetR7_1: R7.1 U5.15 | length 7.3
  Top Layer w0.762: R7.1 114.473,74.93 115.108,74.295 U5.15
NetR8_1: R8.1 U6.15 | length 6
  Top Layer w0.762: R8.1 114.473,27.94 115.108,28.575 U6.15
NetR10_2: R10.2 U5.3 | length 19.9
  Top Layer w0.762: U5.3@128.208,75.565 U5.3 127.537,75.492 126.292,75.492 125.73,74.93 125.73,68.58 R10.2
NetR13_2: R13.2 U6.3 | length 17.2
  Top Layer w0.762: U6.3 130.175,29.845 132.939,32.609 132.939,41.326 133.35,41.737 R13.2
NetR15_1: R15.1 U5.13 | length 20
  Top Layer w0.762: R15.1 111.76,69.85 111.76,75.754 113.476,77.47 118.11,77.47 118.745,76.835 U5.13
NetR16_1: R16.1 U6.13 | length 20
  Top Layer w0.762: R16.1 111.76,40.64 111.76,33.466 112.206,33.02 116.84,33.02 118.672,31.188 119.966,31.188 U6.13
NetR17_2: R17.2 U5.5 | length 16.7
  Top Layer w0.762: U5.5 132.269,78.105 135.89,74.484 135.89,71.12 R17.2
NetR18_2: R18.2 U6.5 | length 26.1
  Top Layer w0.762: U6.5 130.175,32.385 v3(130.81,33.02)
  Bottom Layer w0.762: v3(130.81,33.02) 130.81,50.8 R18.2
NetR19_1: R19.1 U5.11 | length 8.3
  Top Layer w0.762: R19.1 117.475,79.375 U5.11
NetR20_1: R20.1 U6.11 | length 19.8
  Top Layer w0.762: R20.1 117.536,22.286 118.806,22.286 121.92,25.4 121.92,32.582 120.847,33.655 U6.11
NetR25_2: R25.2 U5.7 | length 25.6
  Top Layer w0.762: U5.7 132.715,80.645 137.16,76.2 137.16,66.486 135.444,64.77 R25.2
NetR26_2: R26.2 U6.7 | length 26.6
  Top Layer w0.762: U6.7 128.768,34.925 129.403,35.56 v3(129.54,35.56)
  Bottom Layer w0.762: v3(129.54,35.56) 129.54,53.34 R26.2
NetR27_1: R27.1 U5.9 | length 39.4
  Top Layer w0.762: R27.1 112.746,59.974 111.922,59.974 110.49,61.406 110.49,82.55 113.03,85.09 115.57,85.09 118.745,81.915 U5.9
NetR28_1: R28.1 U6.9 | length 6
  Top Layer w0.762: R28.1 114.473,35.56 115.108,36.195 U6.9
ReleOC: P1.4 R33.1 | length 5.6
  Top Layer w0.762: R33.1 147.112,49.53 148.382,50.8 P1.4@148.59,50.8
TR1_VCC: P3.1 U4.1 | length 51.8
  Top Layer w3.048: P3.1 21.696,20.066 U4.1
TR2_VCC: P3.3 U4.2 | length 54.1
  Top Layer w3.048: P3.3 25.901,30.226 27.686,32.011 27.686,36.056 U4.2
VBAT: P1.3 R37.1 R38.2 | length 76.7
  Top Layer w0.762: 139.254,90.17 139.7,89.724 139.7,51.452 142.957,48.195 148.525,48.195 P1.3@148.59,48.26
  Top Layer w1.27: R37.1 139.254,90.17
  Bottom Layer w1.27: R37.1 R38.2
pads on no net: U4.3 U4.7
copper on no net:
  other v2: 95,15 145,20 95,95

## Silkscreen, mask and mechanical layers (free items; w line width, h text height)
Top Overlay:
  lines w0.1: 0.253,1.041 0.253,102.641 ; 0,0 152.4,0 152.4,101.6 0,101.6 0,0
  text "-" at 1.27,79.248 h1.52
  text "+" at 1.397,74.447 h1.52
  text "M2_1" at 1.067,63.195 h1.52
  text "GND" at 151.282,62.484 h1.52
  text "D2B" at 151.282,59.309 h1.52
  text "M2_2" at 1.067,57.48 h1.52
  text "D2F" at 151.282,56.769 h1.52
  text "D1B" at 151.282,54.229 h1.52
  text "M1_2" at 1.067,53.035 h1.52
  text "D1F" at 151.282,51.689 h1.52
  text "REL" at 151.282,49.149 h1.52
  text "M1_1" at 1.067,47.955 h1.52
  text "VBT" at 151.282,46.609 h1.52
  text "5V" at 151.32,43.988 h1.52
  text "3.3V" at 151.282,41.529 h1.52
  text "TR2G" at 1.067,35.001 h1.52
  text "TR2V" at 1.067,29.921 h1.52
  text "TR1G" at 1.067,24.841 h1.52
  text "TR2V" at 1.067,19.761 h1.52

## Text inside footprints (layer, text, board x,y; h text height)
P1: Top Overlay "9" at 147.3,62.78 h1.02 r90; Top Overlay "1" at 147.3,42.72 h1.02 r90